# Altium PCB ECARD.PcbDoc (part 2 of 2)
Units mm, origin at the board's own origin, x right, y up, seen from the top; angles counter-clockwise.
Board outline 85.5 x 54 mm, 2 copper layers (Top Layer, Bottom Layer); 58 components, 66 nets, 238 pads, 223 vias.
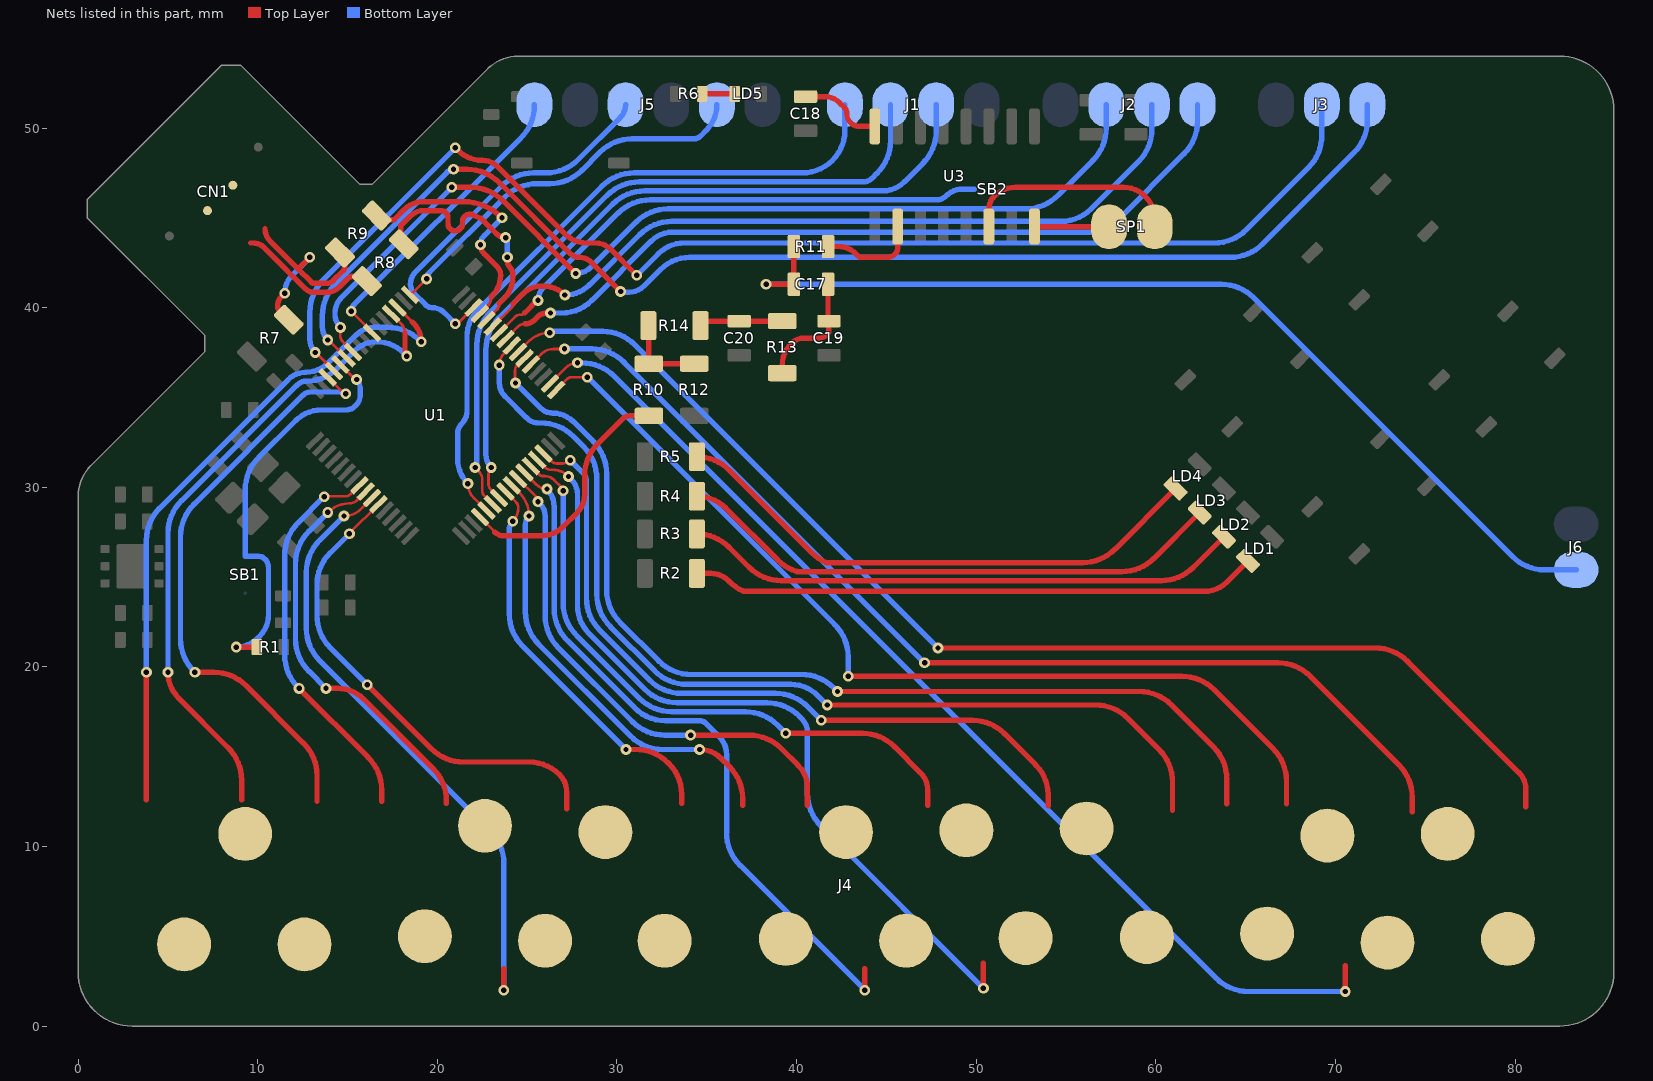
[diagram p2: the nets of this part, all layers, seen from the top]

## Via types
v1: diameter 0.6, hole 0.3, Top Layer to Bottom Layer, 223 vias

## Nets (pads, with @x,y where several pads share a name; then routed paths per layer and width w, separated by ;. In a path a pad name is that pad's centre, name@x,y a point inside that pad or via, vN(x,y) a via of type N, cw(c..) or ccw(c..) an arc to the next point about the centre after c; other vN are vias at no path point) (continued)
NetC17_1: C17.1 J6.2 R11.2 | length 55.1
  Top Layer w0.3: v1(38.3,41.3) C17.1@39.85,41.3 R11.2@39.85,43.4
  Bottom Layer w0.3: v1(38.3,41.3) 63.648,41.3 cw(c63.648,38.76) 65.444,40.556 79.856,26.144 ccw(c81.652,27.94) 81.652,25.4 J6.2@83.4,25.4
NetC17_2: C17.2 C19.2 R13.1 | length 6.8
  Top Layer w0.3: R13.1@39.2,36.35 39.2,36.793 cw(c40.907,36.793) 39.7,38 cw(c40.424,37.276) 40.424,38.3 41.217,38.3 ccw(c41.217,38.983) 41.7,38.5 ccw(c41.459,38.741) 41.8,38.741 C19.2@41.8,39.25 cw(c41.921,39.371) 41.75,39.371 C17.2@41.75,41.3
NetC18_2: C18.2 U3.8 | length 4.8
  Top Layer w0.3: C18.2@40.5,51.75 41.555,51.75 cw(c41.555,50.555) 42.4,51.4 42.659,51.141 cw(c42.317,50.8) 42.8,50.8 42.8,50.783 ccw(c43.483,50.783) 43,50.3 ccw(c43.507,50.807) 43.507,50.09 U3.8@44.355,50.09 cw(c44.258,50.187) U3.8@44.258,50.05
NetC20_2: C20.2 R13.2 R14.1 | length 4.8
  Top Layer w0.3: R14.1@34.45,39.2 cw(c34.571,39.079) 34.571,39.25 C20.2@36.8,39.25 R13.2@39.2,39.25
NetJ1_1: J1.1 U1.21 | length 38.3
  Top Layer w0.15: v1(21.7,30.2) ccw(c22.846,30.2) 22.036,29.389 U1.21@22.728,28.697
  Bottom Layer w0.3: v1(21.7,30.2) cw(c23.088,31.588) 21.125,31.588 21.125,32.982 cw(c21.893,32.982) 21.35,33.525 ccw(c20.626,34.249) 21.65,34.249 21.65,38.41 cw(c23.678,38.41) 22.244,39.844 29.156,46.756 cw(c30.952,44.96) 30.952,47.5 40.31,47.5 ccw(c40.31,49.89) 42,48.2 ccw(c40.334,49.866) 42.69,49.866 J1.1@42.69,51.3
NetJ1_2: J1.2 U1.22 | length 39.9
  Top Layer w0.15: v1(22.1,31.1) 22.288,30.912 cw(c21.776,30.4) 22.5,30.4 22.5,29.8 ccw(c22.905,29.8) 22.619,29.514 U1.22@23.082,29.05
  Bottom Layer w0.3: v1(22.1,31.1) ccw(c21.859,31.341) 22.2,31.341 22.2,37.948 cw(c24.74,37.948) 22.944,39.744 29.456,46.256 cw(c31.252,44.46) 31.252,47 43.717,47 ccw(c43.717,47.683) 44.2,47.2 44.486,47.486 ccw(c42.69,49.282) 45.23,49.282 J1.2@45.23,51.3
NetJ1_3: J1.3 U1.23 | length 41
  Top Layer w0.15: v1(23,31.1) ccw(c23.362,30.738) 22.85,30.738 22.85,30.14 ccw(c23.346,30.2) 22.993,29.846 U1.23@23.436,29.404
  Bottom Layer w0.3: v1(23,31.1) cw(c23.724,31.824) 22.7,31.824 22.7,37.648 cw(c25.24,37.648) 23.444,39.444 29.756,45.756 cw(c31.552,43.96) 31.552,46.5 44.793,46.5 ccw(c44.793,48.207) 46,47 47.026,48.026 ccw(c45.23,49.822) 47.77,49.822 J1.3@47.77,51.3
NetJ2_1: J2.1 U1.41 | length 44.6
  Top Layer w0.15: U1.41@23.789,38.243 24.467,38.921 cw(c24.9,38.488) 24.9,39.1
  Top Layer w0.3: 24.9,39.1 ccw(c24.9,39.824) 25.412,39.312 25.6,39.5 cw(c26.083,39.017) 26.083,39.7 v1(26.3,39.7)
  Bottom Layer w0.3: v1(26.3,39.7) 26.91,39.7 ccw(c26.91,42.09) 28.6,40.4 31.905,43.705 cw(c33.1,42.51) 33.1,44.2 56.351,44.2 ccw(c56.351,46.249) 57.8,44.8 61.576,48.576 ccw(c59.78,50.372) 62.32,50.372 J2.1@62.32,51.3
NetJ2_2: J2.2 U1.43 | length 43.2
  Top Layer w0.15: U1.43@23.082,38.95 24.121,39.989 ccw(c23.895,40.215) 24.215,40.215
  Top Layer w0.3: 24.215,40.215 24.776,40.776 ; 24.776,40.776 cw(c25.8,39.751) 25.8,41.2 25.893,41.2 cw(c25.893,39.493) v1(27.1,40.7)
  Bottom Layer w0.3: v1(27.1,40.7) ccw(c27.1,42.631) 28.466,41.266 31.256,44.056 cw(c33.052,42.26) 33.052,44.8 54.71,44.8 ccw(c54.71,47.19) 56.4,45.5 59.036,48.136 ccw(c57.24,49.932) 59.78,49.932 J2.2@59.78,51.3
NetJ2_3: J2.3 U1.58 | length 55.4
  Top Layer w0.15: v1(14.6,38.9) 14.6,38.4 ccw(c14.988,38.4) 14.714,38.126 U1.58@15.304,37.536
  Top Layer w0.3: v1(20.8,46.7) 21.848,46.7 cw(c21.848,44.16) 23.644,45.956 v1(27.7,41.9)
  Bottom Layer w0.3: v1(14.6,38.9) cw(c15.324,39.624) 14.3,39.624 14.3,39.7 cw(c15.507,39.7) 14.654,40.554 v1(20.8,46.7) ; v1(27.7,41.9) ccw(c27.7,43.107) 28.554,42.254 31.056,44.756 cw(c32.852,42.96) 32.852,45.5 52.748,45.5 ccw(c52.748,48.04) 54.544,46.244 56.496,48.196 ccw(c54.7,49.992) 57.24,49.992 J2.3@57.24,51.3
NetJ3_1: J3.1 U1.59 | length 72.7
  Top Layer w0.15: v1(13.9,38.2) cw(c13.9,38.122) 13.955,38.177 U1.59@14.95,37.182
  Top Layer w0.3: v1(20.9,47.7) 21.648,47.7 cw(c21.648,45.16) 23.444,46.956 27.388,43.012 ccw(c27.9,43.524) 27.9,42.8 cw(c27.9,41.834) 28.583,42.517 v1(30.2,40.9)
  Bottom Layer w0.3: v1(13.9,38.2) cw(c14.624,38.924) 13.6,38.924 13.6,39.548 cw(c16.14,39.548) 14.344,41.344 20.559,47.559 cw(c20.9,47.217) v1(20.9,47.7) ; v1(30.2,40.9) ccw(c30.302,41.002) 30.302,40.858 30.662,40.858 ccw(c30.662,42.054) 31.508,41.208 32.427,42.127 cw(c34.052,40.501) 34.052,42.8 64.148,42.8 ccw(c64.148,45.34) 65.944,43.544 71.036,48.636 ccw(c69.24,50.432) 71.78,50.432 J3.1@71.78,51.3
NetJ3_2: J3.2 U1.61 | length 72.4
  Top Layer w0.15: v1(13.2,37.5) cw(c13.2,37.457) 13.231,37.487 U1.61@14.243,36.475 cw(c14.243,36.518) U1.61@14.212,36.488
  Top Layer w0.3: v1(21,48.9) 21.134,48.766 ccw(c22.5,50.131) 22.5,48.2 cw(c22.5,46.993) 23.353,47.847 27.093,44.107 ccw(c28.317,45.331) 28.317,43.6 28.8,43.6 cw(c28.8,42.393) 29.653,43.247 v1(31.1,41.8)
  Bottom Layer w0.3: v1(13.2,37.5) cw(c13.924,38.224) 12.9,38.224 12.9,39.748 cw(c15.44,39.748) 13.644,41.544 v1(21,48.9) ; v1(31.1,41.8) 32.297,42.997 cw(c33.752,41.543) 33.752,43.6 63.248,43.6 ccw(c63.248,46.14) 65.044,44.344 68.496,47.796 ccw(c66.7,49.592) 69.24,49.592 J3.2@69.24,51.3
NetJ4_1: J4.1 U1.51 | length 37.6
  Top Layer w0.15: U1.51@17.779,40.01 17.79,40.01 18.6,39.2
  Top Layer w0.3: 3.8,12.6 v1(3.8,19.7) ; 18.6,39.2 18.676,39.124 ; 18.676,39.124 cw(c17.651,38.1) v1(19.1,38.1)
  Bottom Layer w0.3: v1(3.8,19.7) 3.8,27.048 cw(c6.34,27.048) 4.544,28.844 11.7,36 cw(c12.666,35.034) 12.666,36.4 ccw(c12.666,38.173) 13.919,36.919 15.5,38.5 cw(c16.466,37.534) 16.466,38.9 17.248,38.9 cw(c17.248,36.36) 19.044,38.156 v1(19.1,38.1)
NetJ4_2: J4.2 U1.52 | length 37.4
  Top Layer w0.15: U1.52@17.425,39.657 18.001,39.081 cw(c17.519,38.6) 18.2,38.6
  Top Layer w0.3: v1@5.1,19.8 v1(5,19.7) ccw(c7.057,19.7) 5.603,18.245 8.356,15.492 cw(c6.56,13.696) 9.1,13.696 9.1,12.6 ; 18.2,38.6 18.2,37.541 ccw(c18.541,37.541) v1(18.3,37.3)
  Bottom Layer w0.3: v1(5,19.7) 5,27.448 cw(c7.54,27.448) 5.744,29.244 12.188,35.688 cw(c12.7,35.176) 12.7,35.9 ccw(c12.7,38.314) 14.407,36.607 15.405,37.605 cw(c16.6,36.41) 16.6,38.1 cw(c16.6,35.927) 18.136,37.464 v1(18.3,37.3)
NetJ4_3: J4.3 U1.62 | length 33.2
  Top Layer w0.15: U1.62@13.89,36.121 14.748,35.263 ccw(c14.9,35.415) v1(14.9,35.2)
  Top Layer w0.3: v1(6.5,19.7) 7.548,19.7 cw(c7.548,17.16) 9.344,18.956 ; 9.344,18.956 12.556,15.744 cw(c10.76,13.948) 13.3,13.948 13.3,12.5
  Bottom Layer w0.3: v1@6.444,19.756 v1(6.5,19.7) ; v1@6.444,19.756 cw(c8.24,21.552) 5.7,21.552 5.7,27.248 cw(c8.24,27.248) 6.444,29.044 12.559,35.159 cw(c12.9,34.817) 12.9,35.3 14.659,35.3 cw(c14.659,34.959) v1(14.9,35.2)
NetJ4_4: J4.4 U1.8 | length 22
  Top Layer w0.15: v1(13.7,29.476) cw(c13.759,29.417) 13.759,29.5 14.9,29.5 ccw(c14.9,29.854) 15.15,29.603 U1.8@15.657,30.111
  Top Layer w0.3: v1(12.3,18.8) 16.156,14.944 cw(c14.36,13.148) 16.9,13.148 16.9,12.5
  Bottom Layer w0.3: v1(12.3,18.8) 12.244,18.856 cw(c14.04,20.652) 11.5,20.652 11.5,26.224 cw(c14.04,26.224) 12.244,28.02 v1(13.7,29.476)
NetJ4_5: J4.5 U1.9 | length 23.4
  Top Layer w0.15: v1(13.9,28.6) 13.905,28.605 cw(c15.1,27.41) 15.1,29.1 ccw(c15.1,29.712) 15.533,29.279 ; 15.533,29.279 U1.9@16.011,29.757
  Top Layer w0.3: v1(13.8,18.8) 14.451,18.8 cw(c14.451,16.751) 15.9,18.2 19.756,14.344 cw(c17.96,12.548) 20.5,12.548 20.5,12.4
  Bottom Layer w0.3: v1(13.8,18.8) 12.844,19.756 cw(c14.64,21.552) 12.1,21.552 12.1,25.748 cw(c14.64,25.748) 12.844,27.544 v1(13.9,28.6)
NetJ4_6: J4.6 U1.10 | length 34.6
  Top Layer w0.15: v1(14.8,28.4) ccw(c14.8,29.754) 15.757,28.796 U1.10@16.364,29.404
  Top Layer w0.3: v1(23.7,2) 23.7,3.2
  Bottom Layer w0.3: v1(14.8,28.4) 13.444,27.044 ccw(c15.24,25.248) 12.7,25.248 12.7,22.152 ccw(c15.24,22.152) 13.444,20.356 22.956,10.844 cw(c21.16,9.048) 23.7,9.048 v1(23.7,2)
NetJ4_7: J4.7 U1.11 | length 27
  Top Layer w0.15: v1(15.1,27.41) cw(c15.154,27.41) 15.116,27.448 U1.11@16.718,29.05
  Top Layer w0.3: v1(16.1,19) 19.656,15.444 ccw(c21.452,17.24) 21.452,14.7 25.11,14.7 cw(c25.11,12.31) 26.8,14 cw(c25.834,13.034) 27.2,13.034 27.2,12.1
  Bottom Layer w0.3: v1(15.1,27.41) 14.014,26.324 ccw(c15.738,24.6) 13.3,24.6 13.3,22.852 ccw(c15.84,22.852) 14.044,21.056 v1(16.1,19)
NetJ4_8: J4.8 U1.24 | length 22.4
  Top Layer w0.15: U1.24@23.789,29.757 24.396,29.15 cw(c24.146,28.9) 24.5,28.9 24.5,28.824 cw(c23.476,28.824) v1(24.2,28.1)
  Top Layer w0.3: v1(30.5,15.4) 31.048,15.4 cw(c31.048,12.86) 32.844,14.656 32.9,14.6 cw(c31.21,12.91) 33.6,12.91 33.6,12.4
  Bottom Layer w0.3: v1(24.2,28.1) ccw(c24.683,27.617) 24,27.617 24,22.952 ccw(c26.54,22.952) 24.744,21.156 v1(30.5,15.4)
NetJ4_9: J4.9 U1.25 | length 25
  Top Layer w0.15: U1.25@24.143,30.111 24.567,29.686 cw(c23.281,28.4) v1(25.1,28.4)
  Top Layer w0.3: v1(34.6,15.4) cw(c34.6,13.71) 35.795,14.905 36.256,14.444 cw(c34.46,12.648) 37,12.648 37,12.3
  Bottom Layer w0.3: v1(25.1,28.4) ccw(c25.583,27.917) 24.9,27.917 24.9,23.052 ccw(c27.44,23.052) 25.644,21.256 30.756,16.144 ccw(c32.552,17.94) 32.552,15.4 v1(34.6,15.4)
NetJ4_10: J4.10 U1.26 | length 28.4
  Top Layer w0.15: U1.26@24.496,30.464 25.486,29.474 cw(c25.212,29.2) v1(25.6,29.2)
  Top Layer w0.3: v1(34.1,16.2) 37.348,16.2 cw(c37.348,13.66) 39.144,15.456 40.1,14.5 cw(c38.893,13.293) 40.6,13.293 40.6,12.3
  Bottom Layer w0.3: v1(25.6,29.2) 25.717,29.083 cw(c25.034,28.4) 26,28.4 26,22.852 ccw(c28.54,22.852) 26.744,21.056 30.856,16.944 ccw(c32.652,18.74) 32.652,16.2 v1(34.1,16.2)
NetJ4_11: J4.11 U1.27 | length 39.4
  Top Layer w0.15: U1.27@24.85,30.818 25.533,30.135 ccw(c26.1,30.702) v1(26.1,29.9)
  Top Layer w0.3: v1(43.8,2) 43.8,3.2
  Bottom Layer w0.3: v1(26.1,29.9) cw(c25.134,28.934) 26.5,28.934 26.5,23.252 ccw(c29.04,23.252) 27.244,21.456 30.993,17.707 ccw(c32.7,19.414) 32.7,17 34.593,17 cw(c34.593,16.5) 34.946,16.854 35.7,16.1 cw(c34.734,15.134) 36.1,15.134 36.1,10.752 ccw(c38.64,10.752) 36.844,8.956 v1(43.8,2)
NetJ4_12: J4.12 U1.28 | length 34.5
  Top Layer w0.15: U1.28@25.203,31.172 25.679,30.696 ccw(c25.85,30.867) 25.85,30.625 25.968,30.625 cw(c25.968,29.886) 26.491,30.409 ; 26.5,30.4 26.929,29.971 cw(c26.759,29.8) v1(27,29.8)
  Top Layer w0.3: v1(39.4,16.3) 43.648,16.3 cw(c43.648,13.76) 45.444,15.556 46.9,14.1 cw(c45.934,13.134) 47.3,13.134 47.3,12.3
  Bottom Layer w0.3: v1(27,29.8) 27,23.552 ccw(c29.54,23.552) 27.744,21.756 31.256,18.244 ccw(c33.052,20.04) 33.052,17.5 37.148,17.5 cw(c37.148,14.96) 38.944,16.756 v1(39.4,16.3)
NetJ4_13: J4.13 U1.29 | length 45.2
  Top Layer w0.15: U1.29@25.557,31.525 25.953,31.129 ccw(c26.325,31.501) 26.325,30.975 26.395,30.975 cw(c26.395,29.695) v1(27.3,30.6)
  Top Layer w0.3: v1(50.4,2.1) 50.4,3.5
  Bottom Layer w0.3: v1(27.3,30.6) v1@27.446,30.454 ; v1@27.447,30.453 cw(c26.593,29.6) 27.8,29.6 27.8,23.411 ccw(c29.999,23.411) 28.444,21.856 31.556,18.744 ccw(c33.352,20.54) 33.352,18 38.348,18 cw(c38.348,15.46) 40.144,17.256 40.3,17.1 cw(c39.576,16.376) 40.6,16.376 40.6,12.952 ccw(c43.14,12.952) 41.344,11.156 v1(50.4,2.1)
NetJ4_14: J4.14 U1.30 | length 41.2
  Top Layer w0.15: U1.30@25.91,31.879 26.333,31.456 ccw(c26.65,31.774) 26.65,31.325 26.978,31.325 ccw(c26.978,31.922) v1(27.4,31.5)
  Top Layer w0.3: v1(41.375,17.025) 49.773,17.025 cw(c49.773,14.485) 51.569,16.281 53.325,14.525 cw(c51.695,12.895) 54,12.895 54,12.275
  Bottom Layer w0.3: v1(27.4,31.5) 28.088,30.812 cw(c27.576,30.3) 28.3,30.3 28.3,23.827 ccw(c30.84,23.827) 29.044,22.031 31.806,19.269 ccw(c33.602,21.065) 33.602,18.525 38.823,18.525 cw(c38.823,15.985) 40.619,17.781 v1(41.375,17.025)
NetJ4_15: J4.15 U1.40 | length 55.6
  Top Layer w0.15: v1(23.45,36.8) cw(c24.407,36.8) 23.73,37.477 U1.40@24.143,37.889
  Top Layer w0.3: v1(41.7,17.875) 56.648,17.875 cw(c56.648,15.335) 58.444,17.131 60.181,15.394 cw(c58.385,13.598) 60.925,13.598 60.925,12
  Bottom Layer w0.3: v1(23.45,36.8) 23.45,35.799 ccw(c24.474,35.799) 23.75,35.075 24.967,33.858 ccw(c25.65,34.541) 25.65,33.575 25.773,33.575 cw(c25.773,31.035) 27.569,32.831 28.131,32.269 cw(c26.335,30.473) 28.875,30.473 28.875,24.052 ccw(c31.415,24.052) 29.619,22.256 32.106,19.769 ccw(c33.902,21.565) 33.902,19.025 39.673,19.025 cw(c39.673,16.907) 41.17,18.405 v1(41.7,17.875)
NetJ4_16: J4.16 U1.38 | length 56.6
  Top Layer w0.15: v1(24.35,35.8) cw(c24.41,35.86) 24.325,35.86 24.325,36.5 cw(c24.705,36.5) 24.436,36.768 U1.38@24.85,37.182
  Top Layer w0.3: v1(42.275,18.625) 59.073,18.625 cw(c59.073,16.085) 60.869,17.881 63.206,15.544 cw(c61.41,13.748) 63.95,13.748 63.95,12.375
  Bottom Layer w0.3: v1(24.35,35.8) 25.742,34.408 ccw(c26.425,35.091) 26.425,34.125 cw(c26.425,32.495) 27.577,33.648 28.681,32.544 cw(c26.885,30.748) 29.425,30.748 29.425,24.277 ccw(c31.965,24.277) 30.169,22.481 32.331,20.319 ccw(c34.127,22.115) 34.127,19.575 40.273,19.575 cw(c40.273,17.035) 42.069,18.831 v1(42.275,18.625)
NetJ4_17: J4.17 U1.33 | length 53.1
  Top Layer w0.15: U1.33@26.618,35.414 27.22,36.017 cw(c27.481,35.756) 27.481,36.125 v1(28.35,36.125)
  Top Layer w0.3: v1(42.875,19.475) 61.448,19.475 cw(c61.448,16.935) 63.244,18.731 66.531,15.444 cw(c64.735,13.648) 67.275,13.648 67.275,12.375
  Bottom Layer w0.3: v1(28.35,36.125) 42.131,22.344 cw(c40.335,20.548) 42.875,20.548 v1(42.875,19.475)
NetJ4_18: J4.18 U1.34 | length 60.5
  Top Layer w0.15: U1.34@26.264,35.768 27.153,36.657 cw(c27.8,36.01) v1(27.8,36.925)
  Top Layer w0.3: v1(70.55,1.925) 70.55,3.375
  Bottom Layer w0.3: v1(27.8,36.925) 28.048,36.925 cw(c28.048,34.385) 29.844,36.181 63.356,2.669 ccw(c65.152,4.465) 65.152,1.925 v1(70.55,1.925)
NetJ4_19: J4.19 U1.37 | length 60.8
  Top Layer w0.15: U1.37@25.203,36.828 25.8,37.425 cw(c26.464,36.761) 26.464,37.7 v1(27.075,37.7)
  Top Layer w0.3: v1(47.125,20.225) 66.798,20.225 cw(c66.798,17.685) 68.594,19.481 73.531,14.544 cw(c71.735,12.748) 74.275,12.748 74.275,11.925
  Bottom Layer w0.3: v1(27.075,37.7) 28.598,37.7 cw(c28.598,35.16) 30.394,36.956 v1(47.125,20.225)
NetJ4_20: J4.20 U1.39 | length 68.1
  Top Layer w0.15: U1.39@24.496,37.536 25.073,38.113 cw(c26.25,36.936) v1(26.25,38.6)
  Top Layer w0.3: v1(47.875,21.05) 72.223,21.05 cw(c72.223,18.51) 74.019,20.306 80.225,14.1 cw(c79.32,13.195) 80.6,13.195 80.6,12.2
  Bottom Layer w0.3: v1(26.25,38.6) cw(c26.431,38.419) 26.431,38.675 29.198,38.675 cw(c29.198,36.135) 30.994,37.931 v1(47.875,21.05)
NetJ5_2: J5.2 U1.49 | length 21.6
  Top Layer w0.15: U1.49@18.486,40.718 ccw(c18.486,40.794) 18.54,40.74 v1(19.4,41.6)
  Bottom Layer w0.3: v1(19.4,41.6) cw(c19.883,41.6) 19.541,41.941 23.756,46.156 cw(c25.552,44.36) 25.552,46.9 26.248,46.9 ccw(c26.248,49.44) 28.044,47.644 29.056,48.656 cw(c30.852,46.86) 30.852,49.4 34.3,49.4 ccw(c34.3,49.883) 34.641,49.541 34.966,49.866 ccw(c33.532,51.3) J5.2@35.56,51.3
NetJ5_4: J5.4 U1.46 | length 21.2
  Top Layer w0.15: v1(21,39.1) ccw(c21,39.368) 21.189,39.178 U1.46@22.021,40.01
  Bottom Layer w0.3: v1(21,39.1) 20.383,39.717 ccw(c19.7,39.034) 19.7,40 cw(c19.7,40.483) 19.359,40.141 18.712,40.788 cw(c19.224,41.3) 18.5,41.3 cw(c19.466,41.3) 18.783,41.983 23.556,46.756 cw(c25.352,44.96) 25.352,47.5 26.048,47.5 ccw(c26.048,50.04) 27.844,48.244 30.183,50.583 ccw(c29.466,51.3) J5.4@30.48,51.3
NetJ5_6: J5.6 U1.55 | length 17.3
  Top Layer w0.15: v1(15.2,39.8) 16.337,38.663 cw(c16.27,38.596) U1.55@16.364,38.596
  Bottom Layer w0.3: v1(15.2,39.8) cw(c15.683,39.8) 15.341,40.141 24.656,49.456 ccw(c22.86,51.252) 25.4,51.252 J5.6@25.4,51.3
NetLD1_1: LD1.1 R2.2 | length 31.6
  Top Layer w0.3: R2.2@34.45,25.2 35.234,25.2 cw(c35.234,23.834) 36.2,24.8 36.256,24.744 ccw(c38.052,26.54) 37.004,24.226 ccw(c37.127,24.5) 37.126,24.2 62.7,24.2 ccw(c62.7,25.969) 63.951,24.718 LD1.1@65.132,25.9
NetLD2_1: LD2.1 R3.2 | length 31.1
  Top Layer w0.3: R3.2@34.45,27.4 cw(c34.45,24.865) 36.242,26.658 37.356,25.544 ccw(c39.152,27.34) 39.152,24.8 60.293,24.8 ccw(c60.293,27.34) 62.09,25.544 LD2.1@63.789,27.243
NetLD3_1: LD3.1 R4.2 | length 30.8
  Top Layer w0.3: R4.2@34.45,29.5 cw(c34.45,27.206) 36.072,28.828 38.956,25.944 ccw(c40.752,27.74) 40.004,25.313 ccw(c40.09,25.6) 40.089,25.3 58.106,25.3 ccw(c58.106,27.84) 59.903,26.044 LD3.1@62.445,28.587
NetLD4_1: LD4.1 R5.2 | length 30.5
  Top Layer w0.3: R5.2@34.45,31.7 cw(c34.45,29.165) 36.242,30.958 40.857,26.343 ccw(c42.652,28.14) 41.604,25.826 ccw(c41.727,26.1) 41.726,25.8 55.919,25.8 ccw(c55.919,28.34) 57.716,26.544 LD4.1@61.102,29.93
NetLD5_1: LD5.1 R6.1 | length 1.8
  Top Layer w0.3: R6.1@34.75,51.9 LD5.1@36.55,51.9
NetR1_2: R1.2 SB1.1 U1.60 | length 23.3
  Top Layer w0.15: U1.60@14.597,36.828 15.372,36.053 ccw(c15.5,36.181) v1(15.5,36)
  Top Layer w0.3: v1(8.8,21.1) R1.2@9.95,21.1
  Bottom Layer w0.3: v1(8.8,21.1) ccw(c8.8,22.79) 9.995,21.595 10.1,21.7 ccw(c8.893,22.907) 10.6,22.907 10.6,25.517 ccw(c9.917,25.517) 10.4,26 ccw(c10.038,25.638) 10.038,26.15 SB1.1@9.3,26.15 9.3,29.848 cw(c11.84,29.848) 10.044,31.644 12.1,33.7 cw(c13.549,32.251) 13.549,34.3 14.917,34.3 ccw(c14.917,34.983) 15.4,34.5 15.488,34.588 ccw(c14.976,35.1) 15.7,35.1 15.7,35.517 ccw(c15.017,35.517) v1(15.5,36)
NetR10_1: R10.1 R12.2 R14.2 | length 4.7
  Top Layer w0.3: R14.2@31.75,39 cw(c31.69,38.94) 31.775,38.94 R10.1@31.775,36.875 R12.2@34.3,36.875
NetR10_2: R10.2 U1.20 | length 13.9
  Top Layer w0.15: U1.20@22.375,28.343 ccw(c22.418,28.343) 22.388,28.312 23.2,27.5
  Top Layer w0.3: 23.2,27.5 ccw(c23.683,27.983) 23.683,27.3 25.793,27.3 ccw(c25.793,29.007) 27,27.8 27.776,28.576 ccw(c26.751,29.6) 28.2,29.6 28.2,30.648 cw(c30.74,30.648) 28.944,32.444 30.3,33.8 cw(c30.722,33.378) 30.722,33.975 R10.2@31.775,33.975
NetR11_1: R11.1 U3.10 | length 5.5
  Top Layer w0.3: R11.1@41.75,43.4 42.334,43.4 cw(c42.334,42.034) 43.3,43 43.429,42.871 ccw(c43.6,43.041) 43.6,42.8 45.017,42.8 ccw(c45.017,43.483) 45.5,43 ccw(c45.198,43.302) 45.625,43.302 U3.10@45.625,44.51
NetSB2_2: SB2.2 U1.42 | length 29.7
  Top Layer w0.15: U1.42@23.436,38.596 24.326,39.486 cw(c24.6,39.212) 24.6,39.6 24.606,39.6 ccw(c24.606,39.965) 24.864,39.707
  Top Layer w0.3: 24.864,39.707 25.527,40.37 cw(c25.6,40.297) v1(25.6,40.4)
  Bottom Layer w0.3: v1(25.6,40.4) cw(c26.566,40.4) 25.883,41.083 30.056,45.256 cw(c31.852,43.46) 31.852,46 47.817,46 ccw(c47.817,46.683) 48.3,46.2 cw(c49.266,45.234) 49.266,46.6 SB2.2@49.9,46.6
NetSP1_1: SP1.1 U3.14 | length 12.3
  Top Layer w0.3: U3.14@50.705,44.51 50.705,45.488 cw(c51.712,45.488) 51,46.2 cw(c52.207,44.993) 52.207,46.7 58.193,46.7 cw(c58.193,44.993) 59.4,46.2 cw(c58.096,44.896) 59.94,44.896 SP1.1@59.94,44.5
NetSP1_2: SP1.2 U3.16 | length 4.2
  Top Layer w0.3: U3.16@53.245,44.51 57.376,44.51 cw(c57.376,44.476) SP1.2@57.4,44.5
USB_DP_N: R8.2 U1.44 | length 14.3
  Top Layer w0.16: U1.44@22.728,39.303 23.299,39.874 ccw(c22.927,40.246) 23.454,40.246
  Top Layer w0.3: R8.2@18.125,43.525 cw(c18.544,43.944) 17.952,43.944 17.952,44.548 18.502,45.098 cw(c19.23,44.37) 19.23,45.4 20.188,45.4 cw(c20.188,44.996) 20.592,44.996 20.592,44.676 ccw(c20.996,44.676) 21.4,44.676 21.4,44.795 cw(c21.804,44.795) 21.959,45.168 22.425,44.975 22.6,44.8 23.288,44.112 ccw(c23.8,44.624) v1(23.8,43.9) ; 23.454,40.246 23.701,40.494 ccw(c22.498,41.698) 24.2,41.698 24.2,41.819 ccw(c23.521,41.819) 24.001,42.299 24,42.3 cw(c24.241,42.541) 23.9,42.541 v1(23.9,42.8)
  Bottom Layer w0.3: v1(23.8,43.9) cw(c23.559,43.659) 23.9,43.659 v1(23.9,42.8)
USB_DP_P: R9.2 U1.45 | length 14.2
  Top Layer w0.16: U1.45@22.375,39.657 22.775,40.057 ccw(c22.232,40.6) 23,40.6
  Top Layer w0.3: R9.2@16.625,45.125 ccw(c17.165,45.665) 17.165,44.902 17.598,44.902 18.149,45.453 cw(c19.229,44.373) 19.229,45.9 21.441,45.9 cw(c21.441,42.86) v1@23.59,45.01 ; v1(22.4,43.5) ccw(c23.124,43.5) 22.612,42.988 23.337,42.263 cw(c22.892,41.819) 23.521,41.819 cw(c21.836,41.819) 23.028,40.628 23,40.6
  Bottom Layer w0.3: v1(22.4,43.5) cw(c23.124,43.5) 22.612,44.012 v1(23.6,45)
USB_N: CN1.2 R8.1 | length 7.9
  Top Layer w0.3: 9.6,43.6 9.734,43.6 cw(c9.734,42.734) 10.346,43.346 11.546,42.146 11.615,42.078 12.273,41.42 12.63,41.063 ccw(c13.152,41.585) 13.152,40.846 13.825,40.846 ccw(c13.825,41.873) 14.551,41.147 15.052,41.649 cw(c15.264,41.437) 15.264,41.737 cw(c15.264,41.437) 15.476,41.649 15.52,41.606 ccw(c15.836,41.922) 15.836,41.475 R8.1@16.075,41.475
USB_P: CN1.3 R7.1 R9.1 | length 12.5
  Top Layer w0.3: 10.4,44.4 ccw(c11.366,44.4) 10.683,43.717 12.25,42.15 ; v1(11.5,40.8) 11.312,40.612 ccw(c11.824,40.1) 11.1,40.1 ccw(c11.461,40.1) 11.205,39.845 R7.1@11.725,39.325 ; v1(12.9,42.8) 12.25,42.15 ; R9.1@14.575,43.075 14.575,42.836 ccw(c15.022,42.836) 14.706,42.52 14.749,42.476 cw(c14.537,42.264) 14.837,42.264 cw(c14.537,42.264) 14.749,42.052 14.198,41.502 cw(c13.823,41.877) 13.823,41.346 13.154,41.346 cw(c13.154,41.588) 12.983,41.417 12.25,42.15
  Bottom Layer w0.3: v1(11.5,40.8) cw(c12.949,40.8) 11.924,41.824 v1(12.9,42.8)
pads on no net: U1.35 U1.36 U1.50 U1.54 U1.56 U1.57 U2.3 U2.5 U3.1 U3.3 X1.2 X1.4

## Polygon pours and split planes (outlines as drawn)
GND on Top Layer "Top Layer-GND" (solid, pour order 1): 0,3 0,29.5 cw(c2.414,29.5) 0.707,31.207 7.056,37.556 7.056,38.444 0.5,45 0.5,46 8,53.5 9.045,53.5 15.688,46.858 16.358,46.858 22.793,53.293 cw(c24.5,51.586) 24.5,54 82.5,54 cw(c82.5,51) 85.5,51 85.5,3 cw(c82.5,3) 82.5,0 3,0 cw(c3,3)
GND on Top Layer "NONET_L01_P000" (solid, shelved, pour order 0): -4.3,61.4 80.448,61.4 cw(c80.448,58.86) 82.244,60.656 90.3,52.6 cw(c89.576,51.876) 90.6,51.876 90.6,-8.2 -3.148,-8.2 cw(c-3.148,-5.66) -4.944,-7.456 -8.3,-4.1
GND on Bottom Layer "Bottom Layer-GND" (solid, pour order 2): 0,3 0,29.5 cw(c2.414,29.5) 0.707,31.207 7.056,37.556 7.056,38.444 0.5,45 0.5,46 8,53.5 9.045,53.5 15.688,46.858 16.358,46.858 22.793,53.293 cw(c24.5,51.586) 24.5,54 82.5,54 cw(c82.5,51) 85.5,51 85.5,3 cw(c82.5,3) 82.5,0 3,0 cw(c3,3)

## Keep-outs
Keep-Out Layer:
  lines w0.2: 0,3 ccw(c3,3) 3,0 82.5,0 ccw(c82.5,3) 85.5,3 85.5,51 ccw(c82.5,51) 82.5,54 24.5,54 ccw(c24.5,51.586) 22.793,53.293 16.358,46.858 15.688,46.858 9.045,53.5 9,53.5 8,53.5 0.5,46 0.5,45 7.056,38.444 7.056,37.556 1.5,32 1,31.5 0.707,31.207 ccw(c2.414,29.5) 0,29.5 0,3

## Silkscreen, mask and mechanical layers (free items; w line width, h text height)
Top Overlay:
  text "RST" at 26.176,45.3 h1
  text "SP+" at 56.9,42.338 h1 r270
  text "SP-" at 59.5,42.338 h1 r270
  text "B3" at 74.254,39.254 h1.52
  text "B4" at 67.254,32.254 h1.52
  text "B2" at 81.254,32.254 h1.52
  text "B1" at 74.254,25.254 h1.52
Bottom Overlay:
  text "GND" at 49.4,49.2 h1 r180
  text "GND" at 54.3,46.048 h1 r270
  text "GND" at 66.2,46.048 h1 r270
  text "VUSB" at 52.695,44.1 h1
  text "SPI SCK" at 41.9,43.273 h1 r270
  text "I2C SCL" at 68.764,43.263 h1 r270
  text "I2C SDA" at 71.328,43.177 h1 r270
  text "SPI MISO" at 44.7,42.916 h1 r270
  text "SPI MOSI" at 47.4,42.892 h1 r270
  text "UASR TX" at 56.833,42.644 h1 r270
  text "UART RX" at 59.367,42.644 h1 r270
  text "UART CK" at 61.9,42.539 h1 r270
  text "GND" at 81.399,27.4 h1
  text "AUDIO" at 81.399,24.9 h1
  text "BOOT 0" at 10.8,22.641 h1 r270
Top Solder:
  rectangle: 72.5,51 73.5,52
  rectangle: 72.5,49 73.5,50
  rectangle: 77.5,48 78.5,49
  rectangle: 78.5,47 79.5,48
  rectangle: 79.5,46 80.5,47
  rectangle: 75.5,50 76.5,51
  rectangle: 74.5,51 75.5,52
  rectangle: 78.5,45 79.5,46
  rectangle: 80.5,45 81.5,46
  rectangle: 81.5,44 82.5,45
  rectangle: 82.5,43 83.5,44
  rectangle: 80.5,43 81.5,44
  rectangle: 77.5,44 78.5,45
  rectangle: 77.5,46 78.5,47
  rectangle: 74.5,49 75.5,50
  rectangle: 75.5,48 76.5,49
  rectangle: 76.5,47 77.5,48
  rectangle: 74.5,47 75.5,48
  rectangle: 82.5,41 83.5,42
  rectangle: 78.5,43 79.5,44
  rectangle: 73.5,50 74.5,51
  region: 77.5,50 78.5,50 78.5,49 78.5,48 79.5,48 80.5,48 80.5,47 81.5,47 81.5,46 81.5,45 82.5,45 83.5,45 83.5,44 84.5,44 84.5,43 85.5,43 85.5,51 ccw(c82.5,51) 82.5,54 74.5,54 74.5,53 75.5,53 75.5,52 76.5,52 76.5,51 76.5,50
Bottom Solder:
  rectangle: 77.5,46 78.5,47
  rectangle: 78.5,45 79.5,46
  rectangle: 77.5,44 78.5,45
  rectangle: 78.5,43 79.5,44
  rectangle: 80.5,43 81.5,44
  rectangle: 82.5,41 83.5,42
  rectangle: 82.5,43 83.5,44
  rectangle: 81.5,44 82.5,45
  rectangle: 80.5,45 81.5,46
  rectangle: 79.5,46 80.5,47
  rectangle: 78.5,47 79.5,48
  rectangle: 77.5,48 78.5,49
  rectangle: 76.5,47 77.5,48
  rectangle: 74.5,47 75.5,48
  rectangle: 75.5,48 76.5,49
  rectangle: 75.5,50 76.5,51
  rectangle: 74.5,49 75.5,50
  rectangle: 73.5,50 74.5,51
  rectangle: 74.5,51 75.5,52
  region: 77.5,50 78.5,50 78.5,49 79.5,49 79.5,48 80.5,48 80.5,47 81.5,47 81.5,46 82.5,46 82.5,45 83.5,45 83.5,44 84.5,44 84.5,43 85.5,43 85.5,51 ccw(c82.5,51) 82.5,54 74.5,54 74.5,53 75.5,53 75.5,52 76.5,52 76.5,51 77.5,51
Mechanical 1:
  lines w0.1: 67.713,28.339 67.713,28.339

## Text inside footprints (layer, text, board x,y; h text height)
J4: Top Overlay "B" at 58.733,13.954 h2; Top Overlay "E" at 78.881,13.954 h2; Top Overlay "D" at 72.333,13.954 h2; Top Overlay "C" at 65.586,13.954 h2; Top Overlay "A" at 52.038,13.954 h2; Top Overlay "G" at 45.286,13.954 h2; Top Overlay "F" at 38.781,13.954 h2; Top Overlay "E" at 32.081,13.954 h2; Top Overlay "D" at 25.333,13.954 h2; Top Overlay "C" at 18.486,13.954 h2; Top Overlay "B" at 11.933,13.954 h2; Top Overlay "A" at 5.138,13.954 h2
J5: Bottom Overlay "SWO" at 24.9,45.796 h1 r270; Bottom Overlay "NRST" at 27.44,45.21 h1 r270; Bottom Overlay "SWDIO" at 29.98,44.696 h1 r270; Bottom Overlay "GND" at 32.52,46.048 h1 r270; Bottom Overlay "SWCLK" at 35.06,44.215 h1 r270; Bottom Overlay "3V3" at 37.6,46.153 h1 r270